# Altium PCB PCB-AV1.PcbDoc
Units mil, origin at the board's own origin, x right, y up, seen from the top; angles counter-clockwise.
Board outline 6000 x 4000 mil, 2 copper layers (Top Layer, Bottom Layer); 63 components, 75 nets, 329 pads, 0 vias.
Unrouted connection lines stored in the file: 165.
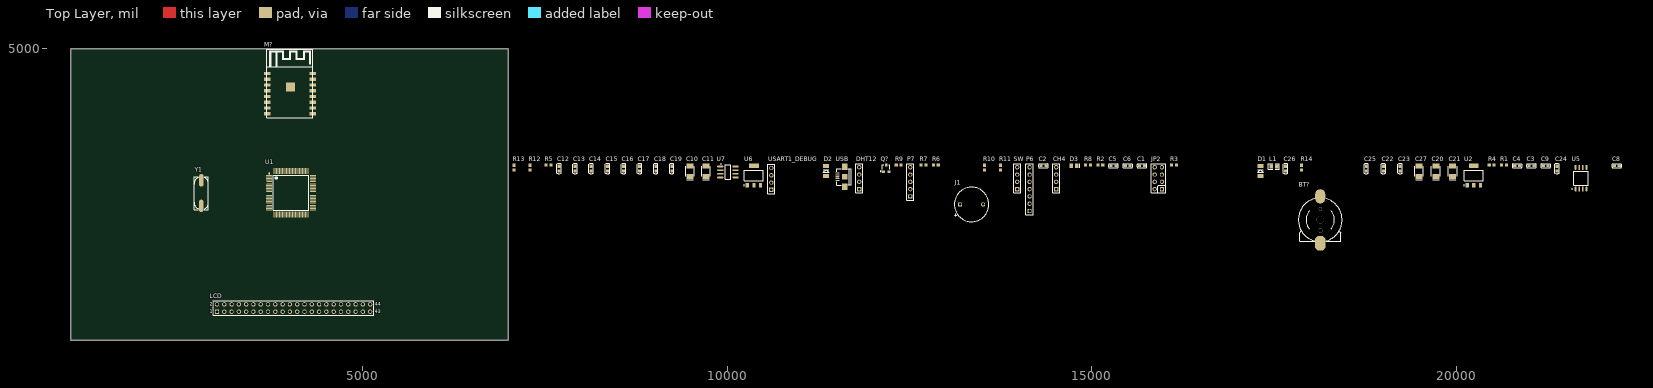
[diagram p0: Top Layer view]
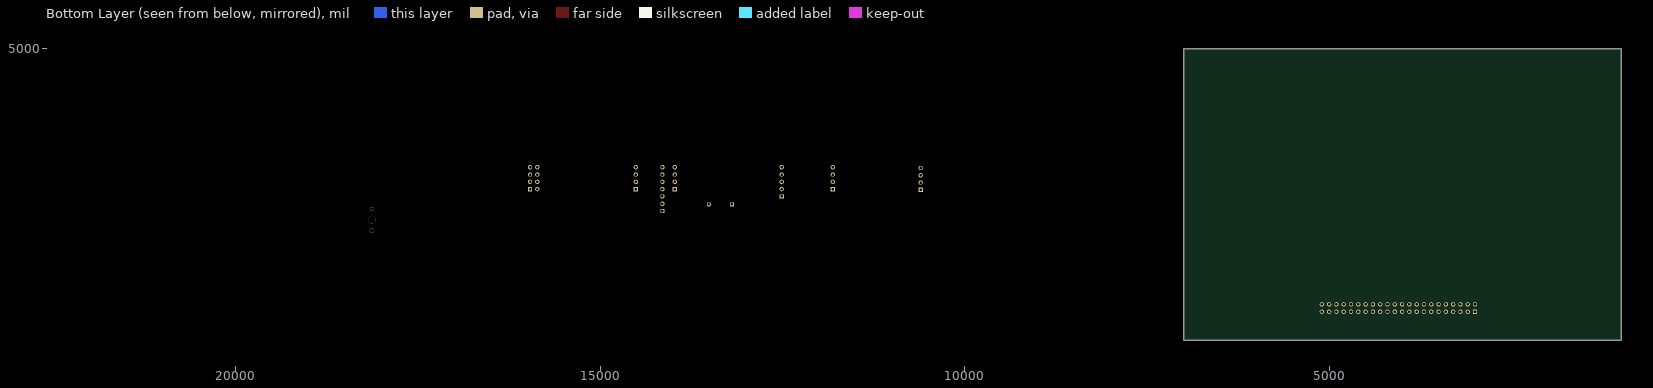
[diagram p1: Bottom Layer view, seen from below]

## Layer stack, top to bottom
Top Layer: signal copper 1.4
Dielectric: dielectric 12.6, FR-4, Dk 4.8
Bottom Layer: signal copper 1.4

## Board outline
1000,1000 7000,1000 7000,5000 1000,5000

## Design rules (kind name [scope] priority, off if disabled: settings)
Clearance [All] p1: gap=10
PolygonConnect [All] p1: connectstyle=Relief reliefconductorwidth=10 reliefentries=4 polygonreliefangle="90 Angle" airgapwidth=10
RoomDefinition SchV1 [InComponentClass('SchV1')] p1: confinementstyle=ConfineIn formatcopy=TRUE lockcomponents=FALSE outline 7045,1060 23040,1060 23040,3535 7045,3535
RoutingVias [All] p1: holewidth=28 width=50 viastyle="Through Hole" minholewidth=28 minwidth=50 maxholewidth=28 maxwidth=50
SolderMaskExpansion [All] p1: expansion=4
Width [All] p1: maxlimit=10 minlimit=10 preferedwidth=10
28 further rules are at their usual default settings.

## Components (designator, comment, footprint, x,y, rotation, side; value= is the part's Value field where it differs from the comment)
BT? "Battery" CR1220 18130,2655 r0 top
C1 "Cap" C-RAD-0603 15685,3395 r0 top
C2 "Cap" C-RAD-0603 14335,3395 r0 top
C3 "Cap" C-RAD-0603 21025,3395 r0 top
C4 "Cap" C-RAD-0603 20830,3395 r0 top
C5 "Cap" C-RAD-0603 15295,3395 r0 top
C6 "Cap" C-RAD-0603 15490,3395 r0 top
C8 "Cap" C-RAD-0603 22195,3395 r0 top
C9 "Cap" C-RAD-0603 21220,3395 r0 top
C10 "Cap Pol" CAP-3528 9490,3320 r90 top
C11 "Cap Pol" CAP-3528 9710,3320 r90 top
C12 "Cap" C-RAD-0603 7695,3355 r90 top
C13 "Cap" C-RAD-0603 7915,3355 r90 top
C14 "Cap" C-RAD-0603 8135,3355 r90 top
C15 "Cap" C-RAD-0603 8360,3355 r90 top
C16 "Cap" C-RAD-0603 8580,3355 r90 top
C17 "Cap" C-RAD-0603 8800,3355 r90 top
C18 "Cap" C-RAD-0603 9020,3355 r90 top
C19 "Cap" C-RAD-0603 9240,3355 r90 top
C20 "Cap Pol" CAP-3528 19715,3320 r90 top
C21 "Cap Pol" CAP-3528 19945,3320 r90 top
C22 "Cap" C-RAD-0603 18995,3355 r90 top
C23 "Cap" C-RAD-0603 19225,3355 r90 top
C24 "Cap" C-RAD-0603 21375,3355 r90 top
C25 "Cap" C-RAD-0603 18760,3355 r90 top
C26 "Cap" C-RAD-0603 17655,3355 r90 top
C27 "Cap Pol" CAP-3528 19485,3320 r90 top
CH4 "Header 4" HDR4X1_A 14510,3075 r90 top
D1 "Diode" DIODE-1206 17310,3255 r90 top
D2 "Diode" DIODE-1206 11355,3255 r90 top
D3 "LED0" LED_0805 14755,3395 r0 top
DHT12 "Header 4" HDR4X1_A 11810,3075 r90 top
J1 "BEEP" Beep 13350,2865 r0 top
JP2 "NRF2401" IDE2X4 15960,3075 r90 top
L1 "Inductor" 0805-1 17495,3385 r0 top
LCD "Header 22X2" HDR2X22 3005,1395 r0 top
M? "ESP-12S Module" "ESP-12S Module" 4005,4385 r0 top
P6 "CHO" HDR1X7 14145,2775 r90 top
P7 "PM25" HDR1X5 12510,2975 r90 top
Q? "SS8050" SOT-23 12180,3360 r0 top
R1 "Res1" 0603-2 20650,3405 r0 top
R2 "Res1" 0603-2 15115,3405 r0 top
R3 "Res1" 0603-2 16125,3405 r0 top
R4 "Res1" 0603-2 20480,3405 r0 top
R5 "Res1" 0603-2 7550,3405 r0 top
R6 "Res1" 0603-2 12860,3405 r0 top
R7 "Res1" 0603-2 12690,3405 r0 top
R8 "Res1" 0603-2 14945,3405 r0 top
R9 "Res1" 0603-2 12350,3405 r0 top
R10 "Res1" 0603-2 13525,3370 r90 top
R11 "Res1" 0603-2 13745,3370 r90 top
R12 "Res1" 0603-2 7295,3370 r90 top
R13 "Res1" 0603-2 7075,3370 r90 top
R14 "Res1" 0603-2 17875,3370 r90 top
SW "Header 4" HDR4X1_A 13975,3075 r90 top
U1 "STM32F407V" LQFP-100_M 4020,3025 r0 top
U2 "ASM1117" SOT-223 20235,3260 r0 top
U5 "W25QXX" SOIC8_W 21705,3225 r90 top
U6 "ASM1117" SOT-223 10365,3260 r0 top
U7 "LM358" NSO8_N 10010,3310 r0 top
USART1_DEBUG "Header 4" HDR4X1_A 10605,3065 r90 top
USB "USB_M" USB_MICRO 11610,3245 r90 top
Y1 "XTAL" X-SM49 2790,3020 r270 top

## Footprints (in the part's own frame and the unit in brackets; to place one, negate y for a bottom-side part, rotate by r counter-clockwise, add the part's x,y. Pads: shape width x height; smd on the part's side, far side on the other; paste and mask are expansions set on the pad)
0603-2 [mm] "贴片无丝印"
  rect 1.1x1 smd: 1(-0.85,0) 2(0.85,0)
0805-1 [mm] "贴片带丝印"
  rect 1.3x1.5 smd: 1(-0.95,0) 2(0.95,0)
  silkscreen extent -1.91,-1.02 1.91,1.02, body extent -1.14,-0.51 1.14,0.51, height 1
Beep [mm] "蜂鸣器"
  rect 1.5x1.5 hole 0.9: 1(-4,0)
  round 1.5 hole 0.9: 2(4,0)
  silkscreen extent -6,-6 6,6
C-RAD-0603 [mm] "贴片电容"
  rect 1.1x1 smd: 1(-0.85,0) 2(0.85,0)
  silkscreen extent -1.73,-0.76 1.73,0.76, body extent -1.14,-0.38 1.14,0.38, height 1
CAP-3528 [mm] "钽电容"
  rect 1.8x2.5 smd: 1(-1.778,0) 2(1.778,0)
  silkscreen extent -2.92,-1.52 1.78,1.52, body extent -1.91,-1.4 1.91,1.4, height 1.1
CR1220 [mm] "钮扣电池"
  round 2.54 hole 2.54: 0(0,0)
  round 1.1 hole 1.1: 0(0,3.75)
  round 1.5 hole 1.5: 0(0.025,-3.75)
  oct 3.5x5 smd: 1(0,-8.128)
  oval 3.5x5 smd: 2(0,8.128)
  silkscreen extent -7.62,-7.5 7.62,7.36
DIODE-1206 [mm] "玻璃封装二极管"
  rect 1.5x2 smd: 1(0,0) 2(3.5,0)
  silkscreen extent 1.25,-1 2.25,1
"ESP-12S Module" [mm]
  rect 2.2x1.1 smd: 1(-7.9,7) 2(-7.9,5) 3(-7.9,3) 4(-7.9,1) 5(-7.9,-1) 6(-7.9,-3) 7(-7.9,-5) 8(-7.9,-7) 9(7.9,-7) 10(7.9,-5) 11(7.9,-3) 12(7.9,-1) 13(7.9,1) 14(7.9,3) 15(7.9,5) 16(7.9,7)
  rect 3.2x3.2 smd: 17(0.22,2.321)
  silkscreen extent -8,-8.5 8,15.5
HDR1X5 [mm] "Connector; Header; 5 Position"
  rect 1.5x1.5 hole 0.9: 1(0,0)
  round 1.5 hole 0.9: 2(2.54,0) 3(5.08,0) 4(7.62,0) 5(10.16,0)
  silkscreen extent -1.27,-1.27 11.43,1.27
HDR1X7 [mm] "Connector; Header; 7 Position"
  rect 1.5x1.5 hole 0.9: 1(0,0)
  round 1.5 hole 0.9: 2(2.54,0) 3(5.08,0) 4(7.62,0) 5(10.16,0) 6(12.7,0) 7(15.24,0)
  silkscreen extent -1.27,-1.27 16.51,1.27
HDR2X22 [mm] "Connector; Header; 22x2 Position"
  rect 1.5x1.5 hole 0.9: 1(0,0)
  round 1.5 hole 0.9: 2(0,2.54) 3(2.54,0) 4(2.54,2.54) 5(5.08,0) 6(5.08,2.54) 7(7.62,0) 8(7.62,2.54) 9(10.16,0) 10(10.16,2.54) 11(12.7,0) 12(12.7,2.54) 13(15.24,0) 14(15.24,2.54) 15(17.78,0) 16(17.78,2.54) 17(20.32,0) 18(20.32,2.54) 19(22.86,0) 20(22.86,2.54) 21(25.4,0) 22(25.4,2.54) 23(27.94,0) 24(27.94,2.54) 25(30.48,0) 26(30.48,2.54) 27(33.02,0) 28(33.02,2.54) 29(35.56,0) 30(35.56,2.54) 31(38.1,0) 32(38.1,2.54) 33(40.64,0) 34(40.64,2.54) 35(43.18,0) 36(43.18,2.54) 37(45.72,0) 38(45.72,2.54) 39(48.26,0) 40(48.26,2.54) 41(50.8,0) 42(50.8,2.54) 43(53.34,0) 44(53.34,2.54)
  silkscreen extent -1.27,-1.27 54.61,3.81
HDR4X1_A [mm] "Connector; Header; 4 Position"
  rect 1.5x1.5 hole 0.9: 1(0,0)
  round 1.5 hole 0.9: 2(2.54,0) 3(5.08,0) 4(7.62,0)
  silkscreen extent -1.27,-1.27 8.89,1.27
IDE2X4 [mm]
  rect 1.5x1.5 hole 0.9: 1(0,0)
  round 1.5 hole 0.9: 2(0,2.54) 3(2.54,0) 4(2.54,2.54) 5(5.08,0) 6(5.08,2.54) 7(7.62,0) 8(7.62,2.54)
  silkscreen extent -1.27,-1.27 8.89,3.81
LED_0805 [mm] "贴片二极管"
  rect 1.3x1.5 smd: 1(-0.95,0) 2(0.95,0)
  silkscreen extent 1.91,-0.64 1.91,0.64
LQFP-100_M [mm] "Thin QFP, 100"
  oval 2.1x0.3 smd: 1(-7.6,6) 2(-7.6,5.5) 3(-7.6,5) 4(-7.6,4.5) 5(-7.6,4) 6(-7.6,3.5) 7(-7.6,3) 8(-7.6,2.5) 9(-7.6,2) 10(-7.6,1.5) 11(-7.6,1) 12(-7.6,0.5) 13(-7.6,0) 14(-7.6,-0.5) 15(-7.6,-1) 16(-7.6,-1.5) 17(-7.6,-2) 18(-7.6,-2.5) 19(-7.6,-3) 20(-7.6,-3.5) 21(-7.6,-4) 22(-7.6,-4.5) 23(-7.6,-5) 24(-7.6,-5.5) 25(-7.6,-6) 51(7.6,-6) 52(7.6,-5.5) 53(7.6,-5) 54(7.6,-4.5) 55(7.6,-4) 56(7.6,-3.5) 57(7.6,-3) 58(7.6,-2.5) 59(7.6,-2) 60(7.6,-1.5) 61(7.6,-1) 62(7.6,-0.5) 63(7.6,0) 64(7.6,0.5) 65(7.6,1) 66(7.6,1.5) 67(7.6,2) 68(7.6,2.5) 69(7.6,3) 70(7.6,3.5) 71(7.6,4) 72(7.6,4.5) 73(7.6,5) 74(7.6,5.5) 75(7.6,6)
  oval 0.3x2.1 smd: 26(-6,-7.6) 27(-5.5,-7.6) 28(-5,-7.6) 29(-4.5,-7.6) 30(-4,-7.6) 31(-3.5,-7.6) 32(-3,-7.6) 33(-2.5,-7.6) 34(-2,-7.6) 35(-1.5,-7.6) 36(-1,-7.6) 37(-0.5,-7.6) 38(0,-7.6) 39(0.5,-7.6) 40(1,-7.6) 41(1.5,-7.6) 42(2,-7.6) 43(2.5,-7.6) 44(3,-7.6) 45(3.5,-7.6) 46(4,-7.6) 47(4.5,-7.6) 48(5,-7.6) 49(5.5,-7.6) 50(6,-7.6) 76(6,7.6) 77(5.5,7.6) 78(5,7.6) 79(4.5,7.6) 80(4,7.6) 81(3.5,7.6) 82(3,7.6) 83(2.5,7.6) 84(2,7.6) 85(1.5,7.6) 86(1,7.6) 87(0.5,7.6) 88(0,7.6) 89(-0.5,7.6) 90(-1,7.6) 91(-1.5,7.6) 92(-2,7.6) 93(-2.5,7.6) 94(-3,7.6) 95(-3.5,7.6) 96(-4,7.6) 97(-4.5,7.6) 98(-5,7.6) 99(-5.5,7.6) 100(-6,7.6)
  silkscreen extent -7.72,-6.15 6.15,6.82, body extent -7,-7 7,7, height 0.8
NSO8_N [mm] "SOIC-max660"
  oval 2.2x0.6 smd: 1(-2.654,1.905) 2(-2.654,0.635) 3(-2.654,-0.635) 4(-2.654,-1.905) 5(2.654,-1.905) 6(2.654,-0.635) 7(2.654,0.635) 8(2.654,1.905)
  silkscreen extent -2.52,-2.5 0.9,2.88, body extent -1.95,-2.45 1.95,2.45, height 1.75
SOIC8_W [mm] "SPI_FLASH"
  oval 1.75x0.6 smd: 1(-3.768,1.905) 2(-3.768,0.635) 3(-3.768,-0.635) 4(-3.768,-1.905) 5(3.768,-1.905) 6(3.768,-0.635) 7(3.768,0.635) 8(3.768,1.905)
  silkscreen extent -3.93,-2.45 2.41,3.3
SOT-23 [mm]
  rect 0.9x0.95 smd: 1(-0.95,-1.175) 2(0.95,-1.175) 3(0,1.175)
  silkscreen extent -2.03,-1.14 1.3,1.18
SOT-223 [mm]
  rect 1.1x1.55 smd: 1(-2.3,-3.375) 2(0,-3.375) 3(2.3,-3.375)
  rect 3.45x1.55 smd: 4(0,3.375)
  silkscreen extent -3.5,-3.48 3.35,1.85, body extent -3.3,-3.94 3.3,3.43, height 0.8
USB_MICRO [mm] "USB方孔"
  oct 0.4x1.35 smd: 1(-1.3,2.54) 2(-0.65,2.54) 3(0,2.54) 4(0.65,2.54) 5(1.3,2.54)
  rect 2.286x1.9 smd: 6(3.429,0) 7(-3.429,0)
  rect 1.8x1.9 smd: 8(0,0)
  silkscreen extent -2.92,-2.29 2.79,2.67
X-SM49 [mm]
  oval 4.4x1.5 smd: 1(4.45,0.004) 2(-4.45,-0.004)
  silkscreen extent -5.7,-2.5 5.72,2.5

## Part data
BT?: "备份电池"
C1 C2 C3 C4 C5 C6 C8 C9 C12 C13 C14 C15 C16 C17 C18 C19 C22 C23 C24 C25 C26: "无极性电容"
C10 C11 C20 C21 C27: "极性电解电容"
CH4 DHT12 SW USART1_DEBUG: "接插件"
D1 D2: "二极管"
D3: "发光二极管"
J1: "蜂鸣器"
JP2: library part "Header 4X2", "Header, 4-Pin, Dual row"
L1: "电感"
LCD: "Header, 22-Pin, Dual row"
P6: library part "Header 7", "Header, 7-Pin"
P7: library part "Header 5", "Header, 5-Pin"
Q?: "NPN贴片三极管"
R1 R2 R3 R4 R5 R6 R7 R8 R9 R10 R11 R12 R13 R14: "贴片电阻"
U1: "STM32单片机100引脚"
U2 U6: "3.3V稳压芯片"
U5: "SPI FLASH"
U7: "双运放"
USB: "MicroUSB接口"
Y1: "晶振"

## Nets (pads, with @x,y where several pads share a name; then routed paths per layer and width w, separated by ;. In a path a pad name is that pad's centre, name@x,y a point inside that pad or via, vN(x,y) a via of type N, cw(c..) or ccw(c..) an arc to the next point about the centre after c; other vN are vias at no path point)
3.3V: C2.2 C11.1 C13.2 C14.2 C15.2 C16.2 C17.2 C18.2 C19.2 C24.2 D1.1 D2.1 DHT12.4 JP2.2 M?.8 R3.2 R4.1 R6.2 R7.2 R8.2 R10.2 R11.1 SW.4 U1.11 U1.19 U1.28 U1.50 U1.75 U1.100 U5.7 U5.8 U6.2 U6.4 USART1_DEBUG.4
3.3V_2: C21.1 C23.2 LCD.40 U2.2 U2.4
5V: C10.1 C12.2 C20.1 C22.2 CH4.1 P6.4 P7.3 U2.3 U6.3 U7.8 USB.1
***PF14_PWM: LCD.38
***PF15_INT: LCD.37
***PG0_SDA: LCD.33
"***PG1 SCL": LCD.32
**BUZZER: R9.2
**CH4_ADC_OUT: R13.2 U7.1
**FLASH_WD: U5.3
**NRF_CE: JP2.3
**NRF_CS: JP2.4
**NRF_IRQ: JP2.8
CH4_ADC: CH4.4 R12.1
D0: LCD.16 U1.61
D1: LCD.17 U1.62
D2: LCD.18 U1.81
D3: LCD.19 U1.82
D4: LCD.20 U1.38
D5: LCD.21 U1.39
D6: LCD.22 U1.40
D7: LCD.23 U1.41
D8: LCD.24 U1.42
D9: LCD.25 U1.43
D10: LCD.26 U1.44
D11: LCD.27 U1.45
D12: LCD.28 U1.46
D13: LCD.29 U1.55
D14: LCD.30 U1.56
D15: LCD.31 U1.57
DHT_SCL: DHT12.1 R7.1 U1.92
DHT_SDA: DHT12.3 R6.1 U1.93
GND: BT?.2 C1.1 C2.1 C3.2 C4.2 C5.1 C6.1 C8.1 C9.1 C10.2 C11.2 C12.1 C13.1 C14.1 C15.1 C16.1 C17.1 C18.1 C19.1 C20.2 C21.2 C22.1 C23.1 C24.1 CH4.2 D3.2 DHT12.2 JP2.1 LCD.2 LCD.39 LCD.41 LCD.42 LCD.43 LCD.44 M?.9 M?.17 P6.3 P7.1 P7.5 Q?.2 R1.1 R2.1 R5.1 SW.1 U1.10 U1.27 U1.74 U2.1 U5.4 U6.1 U7.3 U7.4 USART1_DEBUG.1 USB.5
LCD_CS_PD7: LCD.11 U1.88
LCD_RD_PD4: LCD.14 U1.85
LCD_RS_PD11: LCD.12 U1.58
LCD_RST_PD13: LCD.15 U1.60
LCD_WR_PD5: LCD.13 U1.86
NetBT?_1: BT?.1 D1.2 U1.6
NetC3_1: C3.1 U1.73
NetC4_1: C4.1 U1.49
NetD2_2: D2.2 R5.2
NetD3_1: D3.1 R8.1
NetJ1_1: J1.1 R11.2
NetJ1_2: J1.2 Q?.3 R10.1
NetQ?_1: Q?.1 R9.1
NetR1_2: R1.2 U1.94
NetR2_2: R2.2 U1.37
NetR4_2: R4.2 U1.99
NetR12_2: R12.2 R13.1 U7.2
NetU1_12: U1.12 Y1.2
NetU1_13: U1.13 Y1.1
NRST: C1.2 R3.1 U1.14
OSC32_IN: C6.2 U1.8
OSC32_OUT: C5.2 U1.9
SPI1_MISO: JP2.7 U1.90
SPI1_MOSI: JP2.6 U1.91
SPI1_SCK: JP2.5 U1.89
SPI2_CS: U1.51 U5.1
SPI2_MISO: U1.53 U5.2
SPI2_MOSI: U1.54 U5.5
SPI2_SCK: U1.52 U5.6
SWCLK: SW.2 U1.76
SWDIO: SW.3 U1.72
UART4_RX: P6.6 U1.79
UART4_TX: P6.5 U1.78
USART1_RX: U1.69 USART1_DEBUG.2
USART1_TX: U1.68 USART1_DEBUG.3
USART2_RX: M?.16 U1.26
USART2_TX: M?.15 U1.25
USART3_RX: P7.2 U1.48
USART3_TX: P7.4 U1.47
VDDA: U1.22
VREF: U1.21
VSSA: U1.20
pads on no net: BT?.0 C8.2 C9.2 C25.1 C25.2 C26.1 C26.2 C27.1 C27.2 CH4.3 L1.1 L1.2 LCD.1 LCD.3 LCD.4 LCD.5 LCD.6 LCD.7 LCD.8 LCD.9 LCD.10 LCD.34 LCD.35 LCD.36 M?.1 M?.2 M?.3 M?.4 M?.5 M?.6 M?.7 M?.10 M?.11 M?.12 M?.13 M?.14 P6.1 P6.2 P6.7 R14.1 R14.2 U1.1 U1.2 U1.3 U1.4 U1.5 U1.7 U1.15 U1.16 U1.17 U1.18 U1.23 U1.24 U1.29 U1.30 U1.31 U1.32 U1.33 U1.34 U1.35 U1.36 U1.59 U1.63 U1.64 U1.65 U1.66 U1.67 U1.70 U1.71 U1.77 U1.80 U1.83 U1.84 U1.87 U1.95 U1.96 U1.97 U1.98 U7.5 U7.6 U7.7 USB.2 USB.3 USB.4 USB.6 USB.7 USB.8

## Text inside footprints (layer, text, board x,y; h text height)
LCD: Top Overlay "2" at 2905,1475 h50; Top Overlay "1" at 2905,1375 h50; Top Overlay "44" at 5165,1475 h50; Top Overlay "43" at 5165,1375 h50